# Altium PCB CH32V205RCT-R0.PcbDoc (part 1 of 2)
Units mil, origin at the board's own origin, x right, y up, seen from the top; angles counter-clockwise.
Board outline 3070.87 x 2755.91 mil, 2 copper layers (Top Layer, Bottom Layer); 61 components, 80 nets, 323 pads, 493 vias.
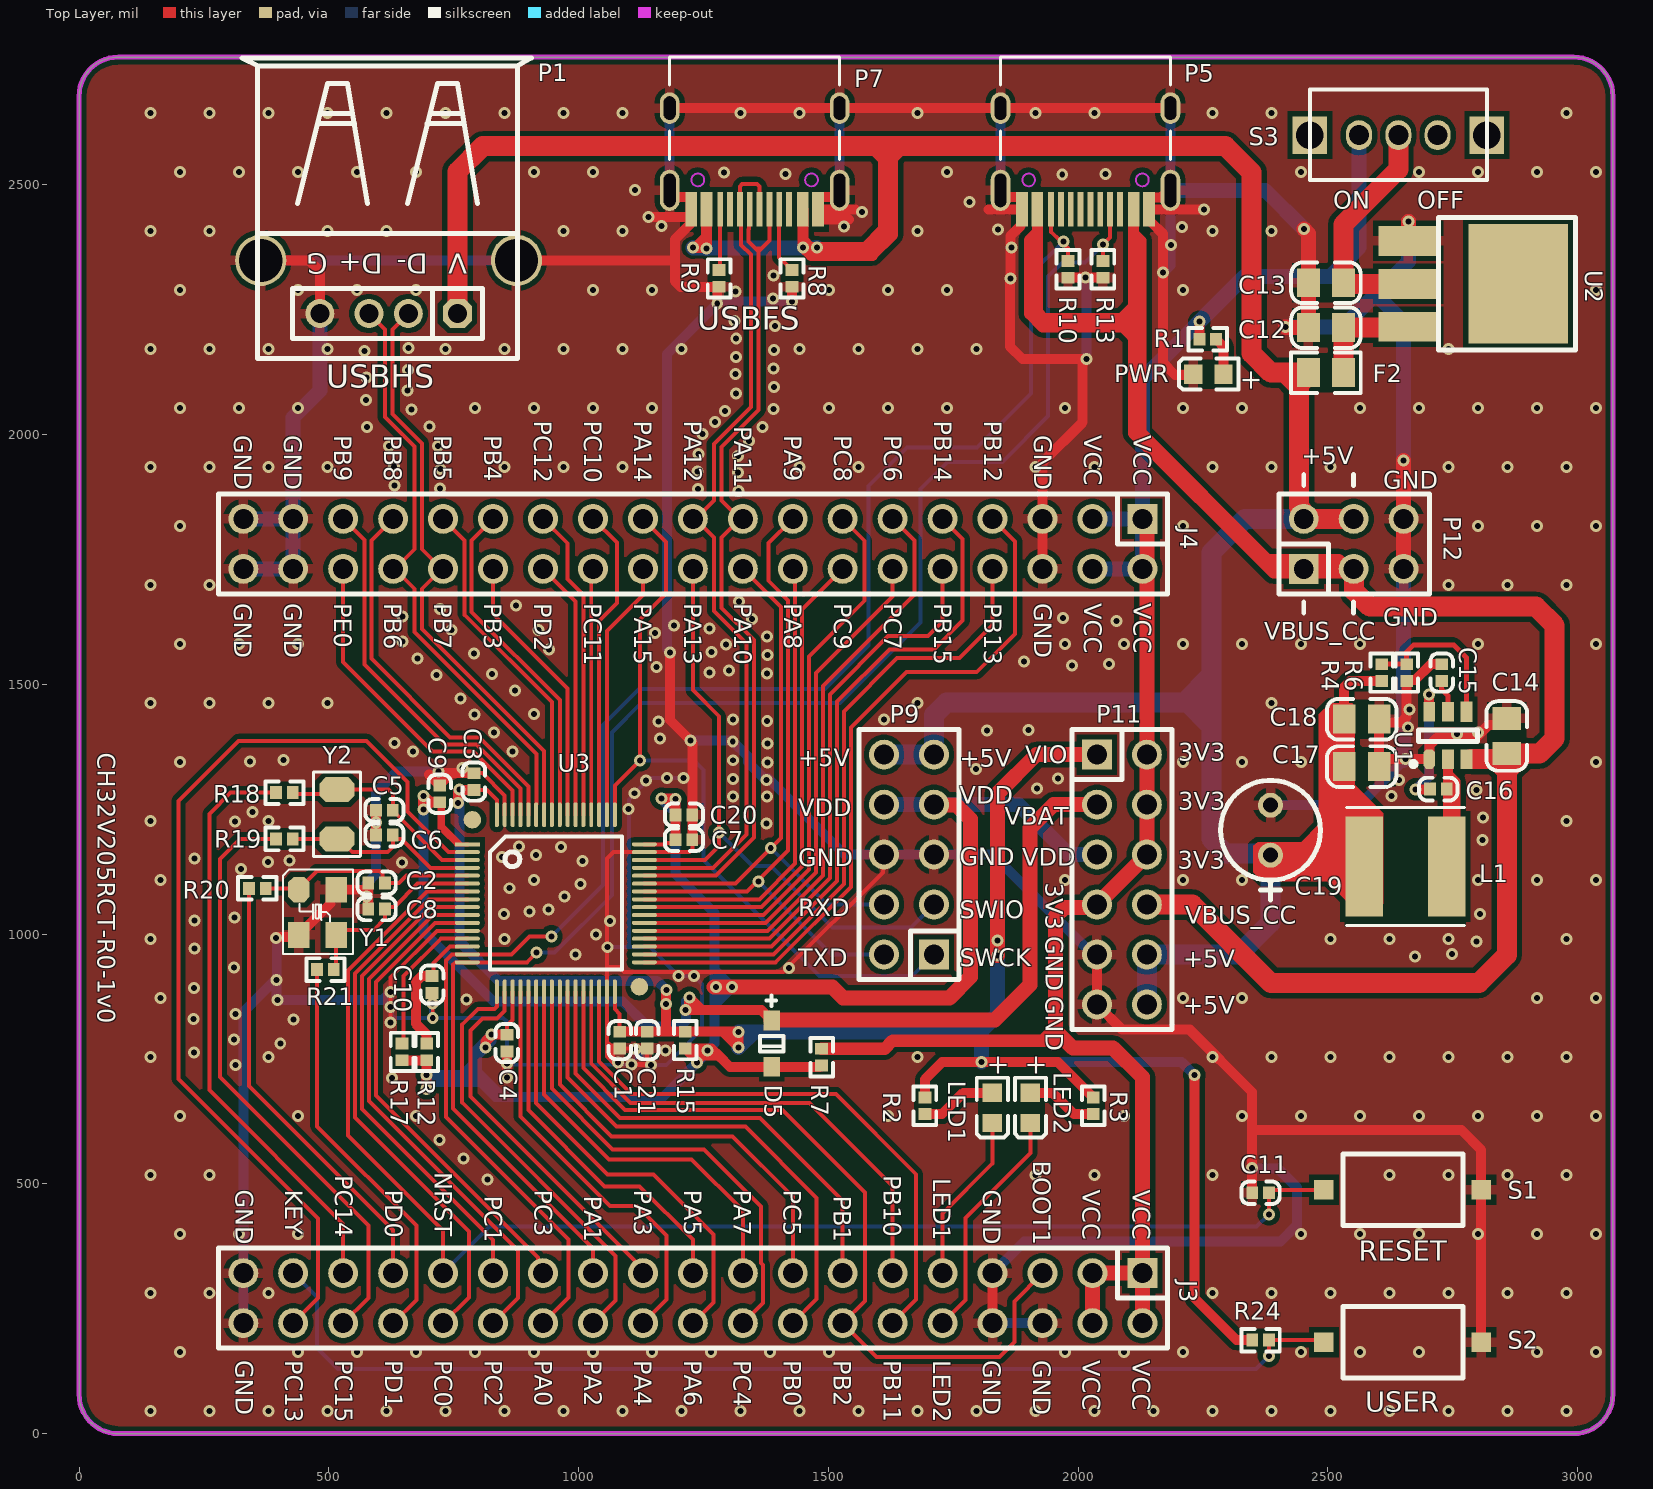
[diagram p0: Top Layer view]
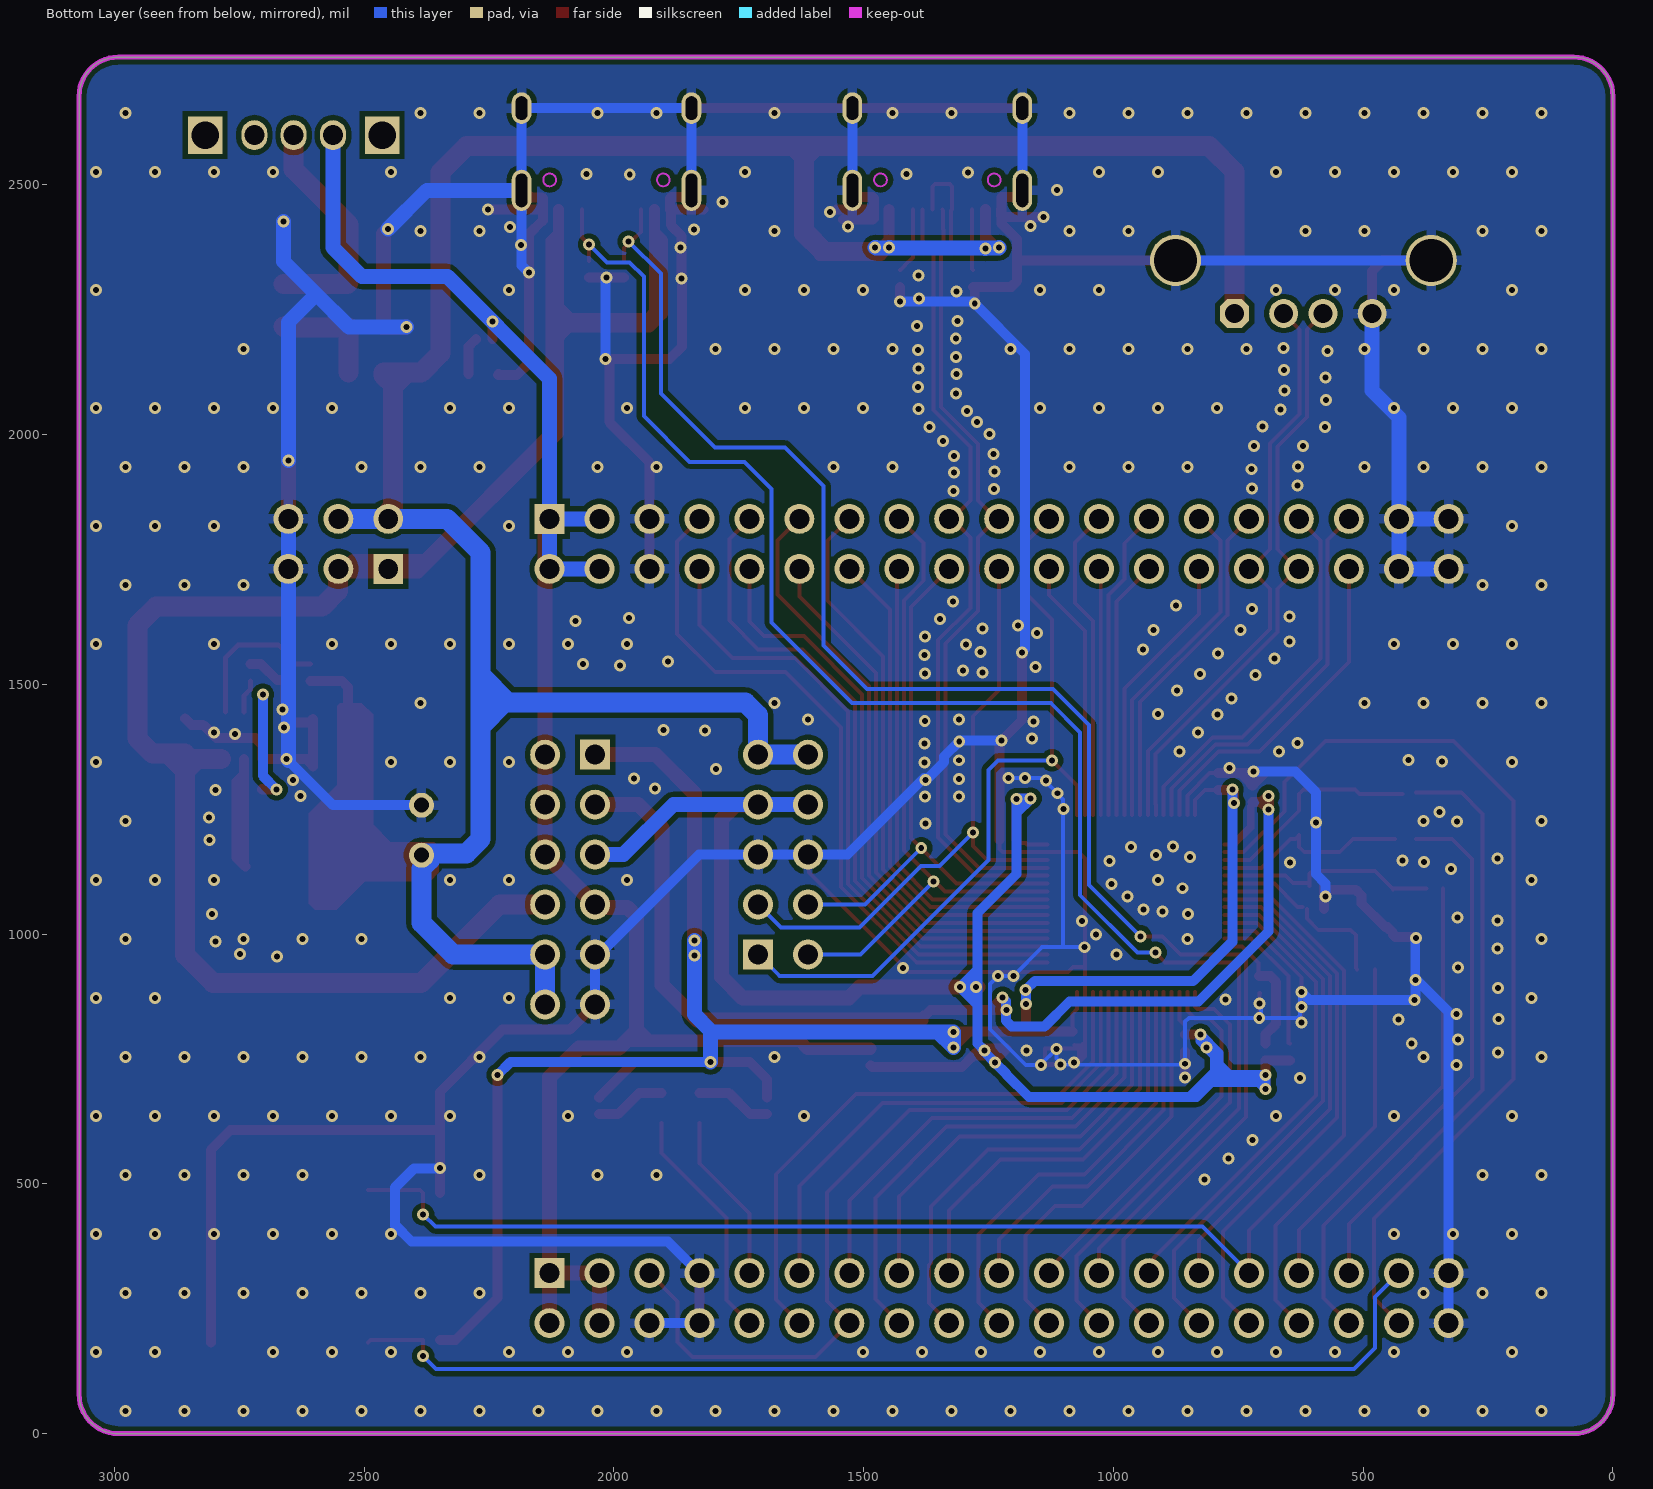
[diagram p1: Bottom Layer view, seen from below]

## Layer stack, top to bottom
Top Solder: solder mask 0.4, Solder Resist, Dk 3.5
Top Layer: signal copper 1.4
Dielectric 1: dielectric 12.6, FR-4, Dk 4.8
Bottom Layer: signal copper 1.4
Bottom Solder: solder mask 0.4, Solder Resist, Dk 3.5

## Board outline
0,78.74 0,2677.17 cw(c78.74,2677.17) 78.74,2755.91 2992.13,2755.91 cw(c2992.13,2677.17) 3070.87,2677.17 3070.87,78.74 cw(c2992.13,78.74) 2992.13,0 78.74,0 cw(c78.74,78.74)

## Design rules (kind name [scope] priority, off if disabled: settings)
Clearance Clearance_1 [InPolygon] p1: gap=10 ignorepadtopadclearanceinfootprint=FALSE
Clearance [All] p2: gap=6 ignorepadtopadclearanceinfootprint=FALSE except(8: Arc-Via Track-Via SMDPad-Via THPad-Via Via-Via Via-Fill Via-Poly Via-Region Via-Hole)
ComponentClearance [All] p1 off: gap=10 collisioncheckmode=3 verticalgap=10 showdistances=FALSE
DiffPairsRouting [All] p1: maxlimit=10 minlimit=7 mostfreqgap=8 toplayer_minwidth=6 toplayer_maxwidth=15 toplayer_prefwidth=8 bottomlayer_minwidth=6 bottomlayer_maxwidth=15 bottomlayer_prefwidth=8 maxuncoupledlength=500
MinimumSolderMaskSliver [All] p1 off: minsoldermaskwidth=10
PolygonConnect PolygonConnect_1 [IsVia] p1: connectstyle=Direct reliefconductorwidth=10 reliefentries=4 polygonreliefangle="90 Angle" airgapwidth=10
PolygonConnect [All] p2: connectstyle=Relief reliefconductorwidth=20 reliefentries=4 polygonreliefangle="90 Angle" airgapwidth=10
RoutingVias [All] p1: holewidth=16 width=28 viastyle="Through Hole" minholewidth=11.81 minwidth=19.68 maxholewidth=28 maxwidth=50
SilkToSilkClearance [All] p1 off: silktosilkclearance=10
SilkToSolderMaskClearance [IsPad] p1 off: minsilkscreentomaskgap=10 clearancetoexposedcopper=TRUE
SolderMaskExpansion [All] p1: expansion=2 istentingtop=FALSE
Width [All] p1: maxlimit=100 minlimit=5 preferedwidth=10
25 further rules are at their usual default settings.

## Classes and differential pairs
differential pair NewDifferentialPair1: +PA11 -PA12
differential pair "PB6 PB7": +PB6 -PB7

## Components (designator, comment, footprint, x,y, rotation, side; value= is the part's Value field where it differs from the comment)
C1 "0.1uF" 0402_C 1082.46,771.21 r180 top
C2 "22pF" 0402_C 578.93,1102.49 r90 top
C3 "0.1uF" 0402_C 790.46,1322.14 r0 top
C4 "0.1uF" 0402_C 856.6,765.34 r180 top
C5 "12pF" 0402_C 628.09,1248.23 r270 top
C6 "12pF" 0402_C 628.09,1198.4 r270 top
C7 "0.1uF" 0402_C 1227.83,1188.79 r270 top
C8 "22pF" 0402_C 578.93,1050.5 r90 top
C9 "0.1uF" 0402_C 722,1264.07 r180 top
C10 "0.1uF" 0402_C 706.71,915.92 r0 top
C11 "0.1uF" 0402_C 2348.57,482.24 r90 top
C12 "10uF" 0805_C 2531.31,2214.06 r180 top
C13 "10uF" 0805_C 2531.31,2304.06 r180 top
C14 "NC(22uF)" 0805_C 2858.22,1431.85 r270 top
C15 "NC(1uF)" 0402_C 2727.91,1540.39 r0 top
C16 "NC(100nF)" 0402_C 2737.91,1290.39 r270 top
C17 "NC(22uF)" 0805_C 2602.91,1335.39 r180 top
C18 "NC(22uF)" 0805_C 2602.91,1430.39 r180 top
C19 "NC(220uF)" CD0.1 2385.31,1158.05 r90 top
C20 "4.7uF" 0402_C 1194.37,1238.79 r90 top
C21 "4.7uF" 0402_C 1137.46,771.21 r180 top
D5 "B0520WS" SOD-323 1386.8,827.14 r270 top
F2 "500mA" 0805 2461.23,2124.06 r0 top
J3 "Header 19X2" IDC38-2.54mm 2128.86,321.33 r270 top
J4 "Header 19X2" IDC38-2.54mm 2128.86,1831.33 r270 top
L1 "NC(15uH)" SMD_6x6mm 2655.24,1135.39 r180 top
LED1 "LED1   blue" 0603+ 1828.23,682.43 r270 top
LED2 "LED2  blue" 0603+ 1904.5,682.43 r270 top
P1 "USBHS" USBAF 757.66,2242.44 r180 top
P5 "USBPD" TYPE-C-Receptacle-2.0 2014.85,2450.82 r180 top
P7 "TYPE-C" TYPE-C-Receptacle-2.0 1352.54,2450.82 r180 top
P9 "LINK" IDC10-2.54mm 1711.51,1359.23 r180 top
P11 "HEADER 6x2" IDC12-2.54mm 2037.77,1359.23 r0 top
P12 "HEADER 3x2" IDC6-2.54mm 2451.79,1731.33 r0 top
PWR "POWER  red" 0603+ 2291.31,2121.02 r180 top
R1 "1K" 0402 2276.31,2191.02 r180 top
R2 "1K" 0402 1693.43,673.15 r270 top
R3 "1K" 0402 2030.28,673.15 r270 top
R4 "NC(100k)" 0402 2607.91,1540.39 r270 top
R6 "NC(20k)" 0402 2657.91,1506.93 r90 top
R7 "0Ω" 0402 1486.65,770.43 r270 top
R8 "NC(5.1K)" 0402 1427.3,2295.98 r90 top
R9 "NC(5.1K)" 0402 1281.3,2295.98 r90 top
R10 "NC(5.1K)" 0402 1979.85,2347.51 r270 top
R12 "0Ω" 0402 696.03,780.86 r270 top
R13 "NC(5.1K)" 0402 2049.85,2347.51 r270 top
R15 "0Ω" 0402 1213.77,804.68 r270 top
R17 "0Ω" 0402 646.72,747.51 r90 top
R18 "NC(0Ω)" 0402 428.05,1283.28 r180 top
R19 "NC(0Ω)" 0402 394.59,1190.61 r0 top
R20 "NC(0Ω)" 0402 340.33,1091.64 r0 top
R21 "NC(0Ω)" 0402 476.67,929.07 r0 top
R24 "10K" 0402 2382.04,187.28 r180 top
S1 "RESET" SMD_6.1x3.65x2.5mm-KEY 2492.11,488.17 r0 top
S2 "USER" SMD_6.1x3.65x2.5mm-KEY 2492.11,182.96 r0 top
S3 "SW" SW1 2641.13,2599.52 r180 top
U1 "NC(DC-DC:20V to 5V)" SOT-23-6 2702.91,1350.39 r0 top
U2 "1117-3.3V" SOT-223 2661.23,2387.95 r270 top
U3 "CH32V205R" LQFP64 777.42,1179.95 r270 top
Y1 "8MHz" XT3225 440.12,1088.89 r270 top
Y2 "32.768k" FC-135 516.59,1289.24 r270 top

## Footprints (in the part's own frame and the unit in brackets; to place one, negate y for a bottom-side part, rotate by r counter-clockwise, add the part's x,y. Pads: shape width x height; smd on the part's side, far side on the other; paste and mask are expansions set on the pad)
0402 [mm]
  rect 0.6x0.65 smd mask+0.051: 1(0,0) 2(0.85,0)
  silkscreen extent -0.55,-0.58 1.4,0.57
0402_C [mm]
  rect 0.65x0.6 smd mask+0.051: 1(0,0) 2(0,-0.85)
  silkscreen extent -0.58,-1.4 0.57,0.55
0603+ [mm]
  rect 0.93x0.98 smd: 1(0,0) 2(1.54,0)
  silkscreen extent -0.76,-0.79 2.27,0.79
0805 [mm]
  rect 1.16x1.47 smd: 1(0,0) 2(1.78,0)
  silkscreen extent -0.88,-1.04 2.66,1.03
0805_C [mm]
  rect 1.16x1.47 smd mask+0.051: 1(0,0) 2(1.78,0)
  silkscreen extent -0.88,-1.04 2.66,1.03
CD0.1 [mil]
  round 50 hole 30: 1(0,0) 2(100,0)
  silkscreen extent -90,-100 150,100
FC-135 [mil]
  oct 50x70 smd: 1(0,0) 2(98.43,0)
  silkscreen extent -35,-47 133,47
IDC6-2.54mm [mil]
  rect 60x60 hole 40: 1(0,0)
  round 60 hole 40: 2(0,100) 3(100,0) 4(100,100) 5(200,0) 6(200,100)
  silkscreen extent -50,-50 252,150
IDC10-2.54mm [mil]
  rect 60x60 hole 40: 1(0,400)
  round 60 hole 40: 2(100,400) 3(0,300) 4(100,300) 5(0,200) 6(100,200) 7(0,100) 8(100,100) 9(0,0) 10(100,0)
  silkscreen extent -50,-50 150,450
IDC12-2.54mm [mil]
  rect 60x60 hole 40: 1(0,0)
  round 60 hole 40: 2(100,0) 3(0,-100) 4(100,-100) 5(0,-200) 6(100,-200) 7(0,-300) 8(100,-300) 9(0,-400) 10(100,-400) 11(0,-500) 12(100,-500)
  silkscreen extent -50,-550 150,50
IDC38-2.54mm [mil]
  rect 60x60 hole 40: 1(0,0)
  round 60 hole 40: 2(100,0) 3(0,-100) 4(100,-100) 5(0,-200) 6(100,-200) 7(0,-300) 8(100,-300) 9(0,-400) 10(100,-400) 11(0,-500) 12(100,-500) 13(0,-600) 14(100,-600) 15(0,-700) 16(100,-700) 17(0,-800) 18(100,-800) 19(0,-900) 20(100,-900) 21(0,-1000) 22(100,-1000) 23(0,-1100) 24(100,-1100) 25(0,-1200) 26(100,-1200) 27(0,-1300) 28(100,-1300) 29(0,-1400) 30(100,-1400) 31(0,-1500) 32(100,-1500) 33(0,-1600) 34(100,-1600) 35(0,-1700) 36(100,-1700) 37(0,-1800) 38(100,-1800)
  silkscreen extent -50,-1850 150,50
LQFP64 [mm]
  round 0.889 smd: 0(-1.246,0.254) 0(7.246,8.746)
  rect 0.203x1.27 smd mask+0.051: 1(0,0)
  oval 0.203x1.27 smd mask+0.051: 2(0.4,0) 3(0.8,0) 4(1.2,0) 5(1.6,0) 6(2,0) 7(2.4,0) 8(2.8,0) 9(3.2,0) 10(3.6,0) 11(4,0) 12(4.4,0) 13(4.8,0) 14(5.2,0) 15(5.6,0) 16(6,0) 33(6,9) 34(5.6,9) 35(5.2,9) 36(4.8,9) 37(4.4,9) 38(4,9) 39(3.6,9) 40(3.2,9) 41(2.8,9) 42(2.4,9) 43(2,9) 44(1.6,9) 45(1.2,9) 46(0.8,9) 47(0.4,9) 48(0,9)
  oval 1.27x0.203 smd mask+0.051: 17(7.5,1.5) 18(7.5,1.9) 19(7.5,2.3) 20(7.5,2.7) 21(7.5,3.1) 22(7.5,3.5) 23(7.5,3.9) 24(7.5,4.3) 25(7.5,4.7) 26(7.5,5.1) 27(7.5,5.5) 28(7.5,5.9) 29(7.5,6.3) 30(7.5,6.7) 31(7.5,7.1) 32(7.5,7.5) 49(-1.5,7.5) 50(-1.5,7.1) 51(-1.5,6.7) 52(-1.5,6.3) 53(-1.5,5.9) 54(-1.5,5.5) 55(-1.5,5.1) 56(-1.5,4.7) 57(-1.5,4.3) 58(-1.5,3.9) 59(-1.5,3.5) 60(-1.5,3.1) 61(-1.5,2.7) 62(-1.5,2.3) 63(-1.5,1.9) 64(-1.5,1.5)
  silkscreen extent -0.39,1.15 6.36,7.86
SMD_6.1x3.65x2.5mm-KEY [mm]
  rect 1x1 smd: 1(0,0) 2(8,0)
  silkscreen extent 0.98,-1.83 7.08,1.83
SMD_6x6mm [mm]
  rect 1.9x5.1 smd: 1(-2.1,0) 2(2.1,0)
  silkscreen extent -3,-3 3,3
SOD-323 [mm]
  rect 1x0.83 smd: 1(0,0) 2(2.36,0)
  silkscreen extent -1.28,-0.6 1.58,0.6
SOT-23-6 [mm] "SOT-23-6"
  oct 0.6x1 smd: 1(0,0)
  rect 0.6x1 smd: 2(0.95,0) 3(1.9,0) 5(0.95,2.4) 6(0,2.4)
  rect 0.6x1.04 smd: 4(1.9,2.4)
  silkscreen extent -0.93,-0.38 2.45,1.49
SOT-223 [mil]
  rect 60x120 smd: 1(0,0) 2(86,0) 3(172,0)
  rect 240x200 smd: ""(86,220)
  silkscreen extent -47,60 219,335
SW1 [mm]
  rect 1.75x1.9 hole 1.4: 0(-4.5,0) 0(4.5,0)
  oval 1.321x1.524 hole 1.016: 1(0,0) 2(-2,0) 3(2,0)
  silkscreen extent -4.51,-2.31 4.5,2.29
TYPE-C-Receptacle-2.0 [mm]
  oval 1x2.1 hole 0.6 slot 1.7 at 90 deg: 0(-4.32,-0.97) 0(4.32,-0.97)
  oval 1x1.6 hole 0.6 slot 1.2 at 90 deg: 0(-4.32,-5.15) 0(4.32,-5.15)
  rect 0.6x1.75 smd mask+0.051: A1(-3.225,0) A4(-2.45,0) B1(3.225,0) B4(2.45,0)
  rect 0.3x1.75 smd mask+0.051: A5(-1.25,0) A6(-0.25,0) A7(0.25,0) A8(1.25,0) B5(1.75,0) B6(0.75,0) B7(-0.75,0) B8(-1.75,0)
  Keep-Out Layer circle w0.1: c2.89,-1.5 r0.325
  Keep-Out Layer circle w0.1: c-2.89,-1.5 r0.325
  silkscreen extent -4.32,-7.75 4.32,-2.55
USBAF [mm]
  round 2.6 hole 2.2: 0(-3,-2.7) 0(10,-2.7)
  oct 1.473x1.473 hole 0.965: 1(0,0)
  round 1.473 hole 0.965: 2(2.5,0) 3(4.5,0) 4(7,0)
  silkscreen extent -3.75,-12.99 10.95,2.29
XT3225 [mm]
  oct 1.3x1.1 smd: 1(0,0)
  rect 1.3x1.1 smd: 2(2.3,0) 3(2.3,1.9) 4(0,1.9)
  silkscreen extent -1.02,-0.8 3.27,2.74

## Part data
C1 C3 C4 C5 C6 C7 C9 C10 C11: library part Cap, "Capacitor"
C2 C8 C12 C13 C19 C20 C21: library part CAP, "Capacitor"
C14 C15 C16 C17 C18: library part "0603 100nF (104) 10% 50V", "贴片电容", Package=0603, SuppliersPartNumber=C14663, ComponentLink1Description=供应商链接, ComponentLink1URL=http://www.szlcsc.com/product/details_15331.html, Supplier=LC
D5: library part DIODE, "Diode"
F2: library part FUSE1, "Fuse"
J3 J4: "Header, 19-Pin, Dual row", LatestRevisionDate=17-Jul-2002, LatestRevisionNote="Re-released for DXP Platform.", Publisher="Altium Limited"
L1: library part INDUCTOR
LED1 LED2 PWR: library part LED0, "Typical INFRARED GaAs LED", LatestRevisionDate=08-Jul-2005, LatestRevisionNote="Mech Layer 1 removed.", PackageReference=LED-0, Published=8-Jun-2000, Publisher="Altium Limited"
P1: library part USB, "USB Port"
P5 P7: library part TYPE-C1
P9: library part "HEADER 5x2", "Header, 5-Pin, Dual row"
P11: "Header, 6-Pin, Dual row"
P12: "Header, 3-Pin, Dual row"
R1 R2 R3: library part "Res Semi", "Semiconductor Resistor"
R4 R6: library part RES
R7 R8 R9 R10 R12 R13 R15 R17 R18 R19 R20 R21 R24: library part Res2, "Resistor"
S1 S2: library part KEY1
U1: library part TPS54202, "DCDC"
U3: "RISC-V MCU, 192MHz, USB_480M, USB FS, PD, PIOC, ADC, TKEY, 2*OPA, 2*CMP"
Y1 Y2: library part XTAL, "Crystal Oscillator", LatestRevisionDate=17-Jul-2002, LatestRevisionNote="Re-released for DXP Platform.", PackageReference=R38, Published=8-Jun-2000, Publisher="Altium Limited"
  Y1: PackageDescription="Crystal, Thru-Hole; 2 Leads; Body 3.1 x 8.2 mm (Dia.xH)"

## Via types
v1: diameter 24, hole 12, Top Layer to Bottom Layer, tented both sides, 493 vias

## Nets (pads, with @x,y where several pads share a name; then routed paths per layer and width w, separated by ;. In a path a pad name is that pad's centre, name@x,y a point inside that pad or via, vN(x,y) a via of type N, cw(c..) or ccw(c..) an arc to the next point about the centre after c; other vN are vias at no path point)
3V3: J3.1 J3.2 J3.3 J3.4 J4.1 J4.2 J4.3 J4.4 P11.2 P11.4 P11.6 P11.7 R1.2 R7.1 S3.3 | length 3971.4
  Top Layer w20: R1.2@2242.84,2191.02 v1(2242.84,2226.01)
  Top Layer w25: R7.1@1486.65,770.43 1612.54,770.43 1628.82,786.71 1968.82,786.71 ; 1930.15,786.71 1955.18,811.74
  Top Layer w30: J3.4@2028.86,221.33 J3.3@2028.86,321.33 J3.1@2128.86,321.33 ; J3.2@2128.86,221.33 J3.1@2128.86,321.33 ; J4.2@2128.86,1731.33 2128.86,1723.21 J4.2@2137.77,1714.3 ; J4.1@2128.86,1831.33 2137.77,1822.42 J4.2@2137.77,1714.3 ; J3.1@2128.86,321.33 2128.86,713.59 2070.12,772.32 1989.53,772.32 1955.18,806.68 1955.18,811.74 1955.18,1035.92 1972.75,1053.49 2032.03,1053.49 P11.7@2037.77,1059.23 P11.6@2137.77,1159.23 P11.4@2137.77,1259.23 P11.2@2137.77,1359.23 J4.2@2137.77,1714.3
  Bottom Layer w30: J4.4@2028.86,1731.33 J4.2@2128.86,1731.33 J4.1@2128.86,1831.33 ; J4.3@2028.86,1831.33 J4.1@2128.86,1831.33 ; S3.3@2562.39,2599.52 2562.39,2374.1 2504.76,2316.47 2333.31,2316.47 2128.86,2112.02 J4.1@2128.86,1831.33
+5V: C17.2 C18.2 C19.1 F2.1 L1.2 P1.1 P7.A4 P7.B4 P9.9 P9.10 P11.10 P11.12 P12.2 P12.4 R4.2 | length 7218.2
  Top Layer w20: C18.2@2532.83,1430.39 2532.83,1494.86 2544.55,1506.57 2607.56,1506.57 R4.2@2607.91,1506.93
  Top Layer w22: P7.B4@1256.08,2450.82 1256.08,2395.3 ; P7.A4@1448.99,2450.82 1448.99,2389.18 ; 1583.75,2577.34 1610.87,2550.23 ; 1653.4,2577.34 1628.27,2552.21 ; 1256.08,2395.3 1235.51,2374.73 1229.11,2374.73 v1(1228.73,2374.35) 1254.52,2374.35 1255.96,2372.91 v1(1256.5,2372.91) 1256.5,2373.45 1256.08,2373.87 1256.08,2395.3 ; 1448.99,2389.18 1463.37,2374.8 ; 1448.99,2389.18 1448.99,2375.93 1449.57,2375.34 v1(1449.57,2374.8) ; v1(1449.57,2374.8) 1465.39,2358.99 1588.03,2358.99 1628.27,2399.23 1628.27,2552.21 ; v1(1449.57,2374.8) 1463.37,2374.8 ; 1463.37,2374.8 v1(1477.17,2374.8) 1574.44,2374.8 1610.87,2411.23 1610.87,2550.23 ; 1610.87,2550.23 1610.87,2577.34 1628.27,2559.94 1628.27,2552.21
  Top Layer w30: C19.1@2385.31,1158.05 2550.16,1158.05 L1.2@2572.56,1135.65 ; C18.2@2532.83,1430.39 C17.2@2532.83,1335.39 2532.83,1238.11 2572.56,1198.39 L1.2@2572.56,1135.65 ; L1.2@2572.56,1135.39 L1.2@2572.56,1135.65
  Top Layer w40: P1.1@757.66,2242.44 757.66,2526.73 808.26,2577.34 1583.75,2577.34 1610.87,2577.34 1653.4,2577.34 2295.13,2577.34 2347.24,2525.23 2347.24,2162.77 2385.95,2124.06 2414.21,2124.06 ; P12.4@2551.79,1831.33 P12.2@2451.79,1831.33 2447.97,1835.15 2447.97,1849.29 2442.47,1854.79 F2.1@2442.47,2095.8 ; 2414.21,2124.06 F2.1@2442.47,2095.8 ; 2414.21,2124.06 F2.1@2461.23,2124.06 2461.23,2117.95 2442.47,2099.2 F2.1@2442.47,2095.8
  Bottom Layer w30: v1(1228.73,2374.35) 1229.11,2373.97 1230.53,2373.97 v1@1258.1,2373.96 ; v1(1256.5,2372.91) 1257.04,2372.91 v1@1258.1,2373.96 ; v1(1449.57,2374.8) 1449.19,2374.42 1447.78,2374.42 v1@1447.32,2373.96 ; v1(1477.17,2374.8) 1476.79,2374.42 1475.37,2374.42 1474.92,2373.96 v1@1447.32,2373.96 ; v1@1258.1,2373.96 v1@1447.32,2373.96
  Bottom Layer w40: P9.10@1611.51,1359.23 P9.9@1711.51,1359.23 1711.51,1438.33 1736.92,1463.74 2212.11,1463.74 ; P11.12@2137.77,859.23 P11.10@2137.77,959.23 2321.79,959.23 2385.31,1022.76 2385.31,1131.4 C19.1@2368.16,1148.55 ; C19.1@2385.31,1158.05 2381.49,1161.88 2354.83,1161.88 2295.36,1161.88 2266.67,1190.57 2266.67,1416.19 ; P12.4@2551.79,1831.33 P12.2@2451.79,1831.33 2334.1,1831.33 2266.67,1763.89 2266.67,1518.29 ; 2212.11,1463.74 2219.12,1463.74 ; 2212.11,1463.74 2266.67,1518.29 ; 2219.12,1463.74 2262.36,1463.74 2266.67,1459.43 ; 2219.12,1463.74 2266.67,1416.19 ; 2266.67,1416.19 2266.67,1459.43 ; 2266.67,1459.43 2266.67,1518.29
BOOT1: J3.5 J3.14 U3.28 | length 1644.4
  Top Layer w8: U3.28@1009.71,884.68 1009.71,731.76 1093.16,648.3 1408.26,648.3 1573.3,483.26 1573.3,265.77 J3.14@1528.86,221.33 1596.24,153.94 1842.31,153.94 1872.28,183.92 1872.28,264.75 J3.5@1928.86,321.33
CC1: J3.26 P5.B5 R10.1 U3.15 | length 3315.5
  Top Layer w8: J3.26@928.86,221.33 979.83,272.29 979.83,389.1 734.92,634.01 734.92,947.58 746.82,959.48 U3.15@777.42,959.48 866.01,959.48 902.26,995.72 v1(945.86,995.72) ; P5.B5@1945.95,2450.82 1945.95,2406.09 1962.39,2389.66 1967.61,2389.66 v1(1970.67,2386.6) 1970.67,2383.09 1979.85,2373.91 R10.1@1979.85,2347.51
  Bottom Layer w8: v1(945.86,995.72) 1048.91,1098.78 1048.91,1418.48 1121.41,1490.98 1493.19,1490.98 1580.1,1577.88 1580.1,1896.73 1657.66,1974.29 1798.05,1974.29 1906.23,2082.47 1906.23,2322.16 v1(1970.67,2386.6)
CC2: J3.23 P5.A5 R13.1 U3.16 | length 3252
  Top Layer w8: v1(915.54,962.86) 896.42,943.73 U3.16@777.42,943.73 753.61,943.73 748.92,939.05 748.92,650.77 1028.86,370.83 J3.23@1028.86,321.33 ; R13.1@2049.85,2347.51 v1(2049.85,2380.44) 2064.06,2394.65 P5.A5@2064.06,2450.82
  Bottom Layer w8: v1(915.54,962.86) 951.65,962.86 1066.66,1077.87 1066.66,1404.06 1125.53,1462.92 1523.27,1462.92 1684.11,1623.77 1684.11,1891.25 1738.31,1945.45 1848.59,1945.45 1940.24,2037.1 1940.24,2316.09 1969.08,2344.94 2014.35,2344.94 v1(2049.85,2380.44)
GND: C1.1 C2.1 C3.1 C4.1 C5.2 C6.2 C7.1 C8.1 C9.2 C10.2 C11.1 C12.2 C13.2 C14.1 C15.1 C17.1 C18.1 C19.2 C20.2 C21.1 J3.6 J3.7 J3.8 J3.37 J3.38 J4.5 J4.6 J4.35 J4.36 J4.37 J4.38 P1.0 P1.4 P5.0 P5.A1 P5.B1 P7.0 P7.A1 P7.B1 P9.5 P9.6 P11.9 P11.11 P12.5 P12.6 PWR.2 R6.1 R8.1 R9.1 R10.2 R13.2 S1.2 S2.2 U1.1 U2.1 U3.12 U3.31 U3.47 U3.63 Y1.2 Y1.4 | length 20048.5
  Top Layer w8: v1(624.01,823.15) v1(624.01,853.77) v1(624.01,884.38) 624.01,913.71 717.02,1006.72 U3.12@777.42,1006.72 ; C10.2@706.71,882.46 C10.2@707.71,881.46 ; v1(707.35,860.76) 707.35,881.09 C10.2@707.71,881.46 ; C10.2@707.97,881.71 C10.2@707.71,881.46 ; v1(708.16,832.46) 708.16,881.01 C10.2@707.71,881.46 ; C3.1@790.46,1322.14 808,1322.14 852.23,1277.91 U3.63@852.23,1239.01 ; 1067.58,773.78 1064.67,776.7 ; v1@1068.79,747.24 1069.09,747.54 1069.09,771.21 ; v1@1070.8,744.12 1062.75,752.16 1062.75,770.09 1061.64,771.21 ; C1.1@1077.54,778.11 1076.13,776.7 1064.67,776.7 ; v1@1079.57,732.02 1056.95,754.64 1056.95,775.9 ; v1(1144.92,737.57) 1144.92,741.9 1137.46,749.36 C21.1@1137.46,771.21 C1.1@1082.46,771.21 1069.09,771.21 ; v1(1200.38,916.27) 1204.71,916.27 1212.44,924 ; C7.1@1227.83,1188.79 1227.83,1170.07 1221.97,1164.2 U3.47@1131.75,1164.2 1069.64,1164.2 1056.95,1151.52 1056.95,934.52 ; P9.6@1611.51,1159.23 1609.25,1156.97 1609.25,1123.63 1409.62,924 1212.44,924 ; 1056.95,775.9 1056.95,784.42 ; 1056.95,775.9 1061.64,771.21 ; 1056.95,784.42 U3.31@1056.95,884.68 1056.95,934.52 ; 1056.95,784.42 1064.67,776.7 ; 1056.95,934.52 1080.85,934.52 1091.36,924 1212.44,924 ; 1061.64,771.21 1069.09,771.21
  Top Layer w10: v1(1106.26,738.93) 1143.56,738.93 v1(1144.92,737.57)
  Top Layer w20: P1.0@363.95,2348.74 460.68,2348.74 482.06,2327.36 P1.4@482.06,2242.44 ; v1(393.91,992.72) 394.99,992.72 396.66,994.4 436.18,994.4 Y1.2@440.12,998.34 ; Y1.2@440.12,1002.27 451.77,1013.93 455.71,1013.93 503.27,1061.48 503.27,1077.23 Y1.4@514.92,1088.89 576.83,1088.89 577.12,1089.18 ; v1(575.87,1075.34) 575.87,1076.42 577.12,1077.67 577.12,1089.18 ; C8.1@578.93,1050.5 C2.1@578.93,1102.49 577.12,1100.68 577.12,1089.18 ; C6.2@594.63,1198.4 v1(594.63,1223.31) C5.2@594.63,1248.23 ; 700.19,1319.34 719.21,1300.33 719.21,1299.34 721.02,1297.53 C9.2@721.54,1297.53 ; C3.1@790.46,1322.14 744.8,1322.14 ; v1(856.51,713.19) 856.6,713.28 v1(856.6,740.55) C4.1@856.6,765.34 ; P1.0@875.77,2348.74 1192.35,2348.74 1192.74,2349.13 ; v1(1140.16,2435.5) P7.B1@1223.76,2435.5 ; P7.0@1182.46,2489.01 1182.46,2484.21 1191.4,2475.27 1223.76,2475.27 P7.B1@1223.76,2449.01 ; P7.0@1182.46,2653.57 P7.0@1522.61,2653.57 P5.0@1844.77,2653.57 P5.0@2184.93,2653.57 ; v1(1183.15,1563.78) 1183.15,1428.76 v1(1224.25,1387.66) 1224.25,1386.58 1227.85,1382.98 C7.1@1227.83,1188.79 ; v1(1277.7,2262.49) 1277.7,2292.38 1278.5,2293.18 1278.5,2294.17 R9.1@1280.31,2295.98 ; R9.1@1281.3,2295.98 R9.1@1280.31,2295.98 ; v1(1427.3,2266.14) R8.1@1427.3,2295.98 ; P7.0@1522.61,2489.01 1522.61,2484.21 1513.67,2475.27 1481.31,2475.27 1479.5,2473.46 P7.A1@1479.5,2450.82 ; 1541.58,2430.78 1481.31,2430.78 1479.5,2432.59 P7.A1@1479.5,2450.82 ; 1554.8,2450.82 P7.A1@1479.5,2450.82 ; 1821.15,2450.82 P5.B1@1887.88,2450.82 ; J3.8@1828.86,221.33 J3.7@1828.86,321.33 ; P5.0@1844.77,2489.01 1844.77,2484.21 1853.72,2475.27 1886.07,2475.27 1887.88,2473.46 P5.B1@1887.88,2450.82 ; v1@1863.35,2311.84 1863.35,2176.57 1888.72,2151.19 v1(2017.12,2151.19) 2017.12,2150.11 2009.23,2142.22 2009.23,2024.89 1928.86,1944.52 J4.5@1928.86,1831.33 J4.6@1928.86,1731.33 ; v1(1864.37,2312.86) 1864.37,2397.51 1886.07,2419.22 1886.07,2449.01 P5.B1@1887.88,2450.82 ; R10.2@1979.85,2314.05 v1(2014.85,2314.05) R13.2@2049.85,2314.05 ; P11.9@2037.77,959.23 P11.11@2037.77,859.23 2088.25,808.75 2223.6,808.75 2348.37,683.98 2348.37,607.9 ; P5.0@2167.41,2476.41 2166.16,2475.16 2143.63,2475.16 2141.82,2473.35 P5.A1@2141.82,2450.82 ; PWR.2@2230.68,2121.02 2232.46,2119.24 2194.09,2119.24 2170.44,2142.88 v1(2170.44,2324.38) 2170.44,2401.18 2145.25,2426.37 2143.63,2426.37 2141.82,2428.18 P5.A1@2141.82,2450.82 ; v1(2251.87,2450.82) P5.A1@2141.82,2450.82 ; C11.1@2348.57,482.24 2348.37,482.45 v1(2348.37,531.83) 2348.37,607.9 ; C17.1@2602.91,1335.39 C17.1@2602.91,1337.56 ; C15.1@2727.91,1540.39 2706.26,1540.39 2674.61,1508.74 2659.72,1508.74 R6.1@2657.91,1506.93 2657.91,1435.67 2646.2,1423.95 2609.36,1423.95 C18.1@2602.91,1430.39 C17.1@2602.91,1337.56 ; S2.2@2807.07,182.96 S1.2@2807.07,488.17 2807.07,568.18 2767.34,607.9 2348.37,607.9 ; C14.1@2858.22,1431.85 2845.39,1419.02 2822.31,1419.02 2796.03,1392.74 2718.01,1392.74 2703.3,1378.03 2703.3,1350.78 U1.1@2702.91,1350.39 2615.75,1350.39 C17.1@2602.91,1337.56 ; C9.2@721.54,1297.53 C9.2@722,1297.53 722.99,1297.53 724.8,1299.34 724.8,1302.14 744.8,1322.14 ; C9.2@721.54,1297.53 719.73,1299.34 v1(719.73,1325.34) 720.81,1325.34 724.01,1322.14 744.8,1322.14 ; 1192.74,2349.13 1192.74,2390.56 1223.76,2421.58 P7.B1@1223.76,2435.5 ; 1192.74,2349.13 1192.74,2307.7 1204.45,2295.98 R9.1@1280.31,2295.98 ; P7.B1@1223.76,2435.5 P7.B1@1223.76,2449.01 ; P7.B1@1223.76,2435.5 1225.57,2437.31 P7.B1@1225.57,2450.82 P7.B1@1223.76,2449.01
  Top Layer w30: v1(2415.6,2215.52) 2417.06,2214.06 C12.2@2461.23,2214.06 C13.2@2461.23,2304.06 2461.23,2402.27 v1(2452.09,2411.4) ; P12.5@2651.79,1731.33 P12.6@2651.79,1831.33 v1(2651.79,1948.58) ; U2.1@2661.23,2387.95 v1(2661.23,2426.51)
  Bottom Layer w8: v1@624.01,882.38 627.07,879.32 627.07,836.89 631.75,832.2 v1@704.54,832.2 ; v1@705.1,831.65 v1@704.54,832.2 ; v1(707.35,860.76) 704.29,857.7 704.29,832.46 v1@704.54,832.2 ; v1(708.16,832.46) 849.07,832.46 856.6,824.93 v1(856.6,740.55) 858.6,738.55 1105.89,738.55 1105.89,742.88 1114.19,751.19 v1(1114.19,770.39) 1147.01,737.57 1175.04,737.57 1247.09,809.62 1247.09,900.1 v1(1230.7,916.49) 1200.6,916.49 v1(1200.38,916.27) 1142.86,973.78 1100.65,973.78 ; v1(1058.43,973.78) 1100.65,973.78 ; v1(1209.7,1312.57) v1(1177.2,1312.57) 1144.58,1312.57 1136.88,1304.87 1135.12,1304.87 v1(1112.32,1282.06) 1112.32,1281.05 1100.65,1269.38 1100.65,973.78
  Bottom Layer w20: J3.38@328.86,221.33 J3.37@328.86,321.33 328.86,844.17 v1@394.22,909.53 ; P1.0@363.95,2348.74 P1.0@875.77,2348.74 ; v1(393.91,992.72) 394.67,991.96 394.67,989.13 395.87,987.93 v1@395.87,909.41 ; v1(395.64,908.1) 395.64,870.71 397.03,869.32 v1(397.03,868.23) 607.85,868.23 v1(624.01,884.38) ; v1(575.87,1075.34) 575.87,1101.38 594.63,1120.15 v1(594.63,1223.31) 594.63,1283.98 635.99,1325.34 v1(719.73,1325.34) ; P7.0@1182.46,2489.01 P7.0@1182.46,2653.57 ; v1(1183.15,1563.78) 1183.15,1564.86 1176.84,1571.17 1176.84,2161.63 v1(1277.7,2262.49) 1281.35,2266.14 v1(1427.3,2266.14) ; v1(1224.25,1387.66) 1305.86,1387.66 1307.64,1385.88 v1(1308.72,1385.88) 1339.05,1355.55 1339.05,1344.29 v1@1375.07,1308.28 ; v1@1379.13,1312.34 1532.24,1159.23 P9.6@1611.51,1159.23 P9.5@1711.51,1159.23 1829.39,1159.23 2029.39,959.23 P11.9@2037.77,959.23 P11.11@2037.77,859.23 ; P7.0@1522.61,2489.01 P7.0@1522.61,2653.57 ; J3.8@1828.86,221.33 J3.6@1928.86,221.33 ; J3.7@1828.86,321.33 1892.08,384.54 2405.16,384.54 2437.79,417.18 2437.79,493.32 2400.64,530.47 2349.72,530.47 v1(2348.37,531.83) ; P5.0@1844.77,2489.01 P5.0@1844.77,2653.57 P5.0@2184.93,2653.57 P5.0@2184.93,2489.01 2184.93,2338.87 v1(2170.44,2324.38) ; v1@1863.35,2311.84 v1(1864.37,2312.86) ; v1@2012.58,2312.86 2013.77,2314.05 v1(2014.85,2314.05) 2014.85,2312.96 2017.12,2310.7 v1(2017.12,2151.19) ; C19.2@2385.31,1258.05 2562.48,1258.05 2651.79,1347.37 v1(2655.04,1350.62)
  Bottom Layer w30: J4.38@328.86,1731.33 J4.36@428.86,1731.33 J4.35@428.86,1831.33 ; J4.37@328.86,1831.33 J4.35@428.86,1831.33 ; P1.4@482.06,2242.44 482.06,2087.95 428.86,2034.74 J4.35@428.86,1831.33 ; P5.0@2184.93,2489.01 2374.49,2489.01 v1(2452.09,2411.4) ; v1(2415.6,2215.52) 2530.55,2215.52 2595.89,2280.85 ; v1@2651.79,1347.37 P12.5@2651.79,1731.33 P12.6@2651.79,1831.33 ; v1(2651.79,1948.58) 2651.79,2224.95 2595.89,2280.85 ; v1(2661.23,2426.51) 2661.23,2346.19 2595.89,2280.85
  other v1: 143.58,45 261.69,45 379.8,45 497.91,45 616.02,45 734.13,45 852.24,45 970.35,45 1088.46,45 1206.57,45 1324.68,45 1442.79,45 1560.9,45 1679.01,45 1797.12,45 1915.23,45 2033.34,45 2151.45,45 2269.56,45 2387.67,45 2505.78,45 2623.89,45 2742,45 2860.11,45 2978.22,45 202.63,163.11 438.85,163.11 556.96,163.11 675.07,163.11 793.19,163.11 911.3,163.11 1029.41,163.11 1147.52,163.11 1265.63,163.11 1383.74,163.11 1501.85,163.11 1974.29,163.11 2092.4,163.11 2210.51,163.11 2446.73,163.11 2564.84,163.11 2682.95,163.11 2919.17,163.11 3037.28,163.11 143.58,281.22 261.69,281.22 379.8,281.22 2269.56,281.22 2387.67,281.22 2505.78,281.22 2623.89,281.22 2742,281.22 2860.11,281.22 2978.22,281.22 202.63,399.33 320.74,399.33 438.85,399.33 2446.73,399.33 2564.84,399.33 2682.95,399.33 2801.06,399.33 2919.17,399.33 3037.28,399.33 817.91,508.79 143.58,517.44 261.69,517.44 1915.23,517.44 2033.34,517.44 2269.56,517.44 2623.89,517.44 2742,517.44 2860.11,517.44 2978.22,517.44 769.64,551.02 721.98,587.83 202.63,635.55 438.85,635.55 675.07,635.55 1619.96,635.55 2092.4,635.55 2328.62,635.55 2446.73,635.55 2564.84,635.55 2682.95,635.55 2801.06,635.55 2919.17,635.55 3037.28,635.55 626.93,712.04 312.99,738.13 1079.48,743.07 143.58,753.66 379.8,753.66 1679.01,753.66 2269.56,753.66 2387.67,753.66 2505.78,753.66 2623.89,753.66 2742,753.66 2860.11,753.66 2978.22,753.66 230.6,763.26 1173.84,766.98 402.88,781.08 310.61,789.29 429.76,829.03 229.48,829.99 312.99,840.06 775.97,868.7 163.33,871.77 2210.51,871.77 2328.62,871.77 2919.17,871.77 3037.28,871.77 230.23,891.87 1421.05,931.98 310.21,933.26 2674.95,955.66 994.27,959.16 2748.86,960.65 230.97,971.27 2797.8,985.62 143.58,989.88 852.24,989.88 2505.78,989.88 2623.89,989.88 2742,989.88 2978.22,989.88 1034.91,999.06 1063.24,1026.65 230.97,1027.19 311.57,1032.99 850.35,1040.81 2804.8,1040.02 901.43,1045.66 940.21,1049.76 972.27,1075.49 861.54,1091.89 1003.96,1100.09 163.33,1107.99 911.3,1107.99 1974.29,1107.99 2210.51,1107.99 2328.62,1107.99 2801.06,1107.99 2919.17,1107.99 3037.28,1107.99 324.62,1130.07 646.95,1143.01 378.56,1144.74 1007.69,1146.33 421.28,1147.76 231.49,1151.53 847,1154.53 914.48,1158.26 965.19,1174.66 881.3,1175.78 2809.57,1188.06 1376.7,1221.58 312.01,1225.25 143.58,1226.1 379.8,1226.1 2978.22,1226.1 2810.94,1233.08 347.23,1244.33 1100.17,1250.77 1309.5,1275.6 1377,1275.2 2627.27,1276.89 2797.29,1289.02 1917.81,1291.96 1134.78,1307.1 1376.07,1308.28 2642.65,1309.04 1309.56,1310.28 1960.13,1311.42 1795.23,1330.61 767.67,1332.14 1378.39,1343.88 202.63,1344.21 2210.51,1344.21 2328.62,1344.21 2446.73,1344.21 3037.28,1344.21 342.78,1345.36 409.86,1348.61 1309.2,1348.12 668.4,1365.57 867.43,1365.83 1378.39,1381.39 631.79,1382.33 1163.57,1391.58 2758.67,1400.37 831.08,1403.48 2800.61,1403.63 1817.9,1407.94 1900.46,1409.1 2660.82,1413.88 1159.89,1426.1 1377.78,1427.02 1309.2,1429.45 1611.51,1429.45 791.97,1439.91 910.9,1440.93 2663.62,1449.76 143.58,1462.32 261.69,1462.32 379.8,1462.32 497.91,1462.32 1679.01,1462.32 2387.67,1462.32 763.46,1471.44 872.44,1487.64 715.95,1518.96 826.65,1520.61 1376.88,1522.08 1262.47,1523.77 1301.28,1527.82 1155.75,1535.19 1988.26,1538.17 2061.51,1541.08 1891.74,1545.73 677.93,1551.35 1378.57,1559.21 790.93,1561.82 1265.85,1565.28 940.69,1570.25 1295.55,1579.79 202.63,1580.43 320.74,1580.43 438.85,1580.43 1974.29,1580.43 2092.4,1580.43 2210.51,1580.43 2328.62,1580.43 2446.73,1580.43 2564.84,1580.43 2801.06,1580.43 3037.28,1580.43 647.15,1585.63 1376.88,1595.99 1153.44,1602.38 746.05,1608.53 919.69,1608.54 1262.13,1612.19 1190.73,1617.57 2076.63,1627.13 1346.84,1630.75 1970.23,1632.94 647.15,1636 722.24,1650.65 875.23,1657.94 1320.86,1666.19 143.58,1698.54 261.69,1698.54 2742,1698.54 2860.11,1698.54 2978.22,1698.54 202.63,1816.65 2210.51,1816.65 2801.06,1816.65 2919.17,1816.65 3037.28,1816.65 1320.72,1887.6 1239.41,1891.39 722.86,1892.21 631.78,1898.11 1318.87,1924.17 1238.45,1926.48 724.09,1930.67 143.58,1934.76 261.69,1934.76 379.8,1934.76 497.91,1934.76 852.24,1934.76 970.35,1934.76 1088.46,1934.76 1442.79,1934.76 1560.9,1934.76 1915.23,1934.76 2033.34,1934.76 2269.56,1934.76 2387.67,1934.76 2505.78,1934.76 2742,1934.76 2860.11,1934.76 2978.22,1934.76 630.67,1935.74 1319.08,1957.58 1240.54,1961.04 620.16,1977.24 718.59,1977.69 1341.13,1987.53 1248.48,2001.68 576.44,2014.87 1368.63,2015.03 702.11,2016.15 1272.77,2025.03 1293.31,2047.33 665.47,2050.35 1390.54,2051.13 202.63,2052.87 320.74,2052.87 438.85,2052.87 793.19,2052.87 911.3,2052.87 1029.41,2052.87 1147.52,2052.87 1501.85,2052.87 1619.96,2052.87 1738.07,2052.87 1974.29,2052.87 2210.51,2052.87 2328.62,2052.87 2564.84,2052.87 2682.95,2052.87 2801.06,2052.87 2919.17,2052.87 3037.28,2052.87 574.78,2069.66 1314.78,2081.82 657.53,2088.2 1390.97,2094.96 575.33,2114.49 1314.43,2120.89 658.14,2129.72 1390.12,2132.35 1315.14,2155.73 572.01,2167.61 1390.98,2169.73 143.58,2170.98 261.69,2170.98 379.8,2170.98 497.91,2170.98 734.13,2170.98 852.24,2170.98 970.35,2170.98 1088.46,2170.98 1206.57,2170.98 1442.79,2170.98 1560.9,2170.98 1679.01,2170.98 1797.12,2170.98 2742,2170.98 659.98,2173.07 1315.72,2192.57 1393.49,2217.75 1312.36,2227.26 1389.58,2272.02 1314.6,2286.57 202.63,2289.09 438.85,2289.09 556.96,2289.09 675.07,2289.09 1029.41,2289.09 1147.52,2289.09 1501.85,2289.09 1619.96,2289.09 1738.07,2289.09 2210.51,2289.09 3037.28,2289.09 1390.69,2318.46 1867.19,2374.3 2185.72,2379.32 143.58,2407.2 261.69,2407.2 497.91,2407.2 616.02,2407.2 970.35,2407.2 1088.46,2407.2 1679.01,2407.2 2269.56,2407.2 2387.67,2407.2 1839.92,2410.17 2207.96,2415.2 1531.3,2416.21 1165.89,2417.96 1567.55,2446.03 1782.53,2465.41 1113.27,2489.29 1968.34,2520.66 1414.37,2521.45 2055.15,2521.37 1291.59,2524.37 202.63,2525.31 320.74,2525.31 438.85,2525.31 556.96,2525.31 675.07,2525.31 911.3,2525.31 1029.41,2525.31 1738.07,2525.31 2446.73,2525.31 2682.95,2525.31 2801.06,2525.31 2919.17,2525.31 3037.28,2525.31 143.58,2643.42 261.69,2643.42 379.8,2643.42 497.91,2643.42 616.02,2643.42 734.13,2643.42 852.24,2643.42 970.35,2643.42 1088.46,2643.42 1324.68,2643.42 1442.79,2643.42 1679.01,2643.42 1915.23,2643.42 2033.34,2643.42 2269.56,2643.42 2387.67,2643.42 2978.22,2643.42